# Altium PCB Alim2015.PcbDoc
Units mm, origin at the board's own origin, x right, y up, seen from the top; angles counter-clockwise.
Board outline 200 x 100 mm, 2 copper layers (Top Layer, Bottom Layer); 1 components, 34 nets, 12 pads, 0 vias.
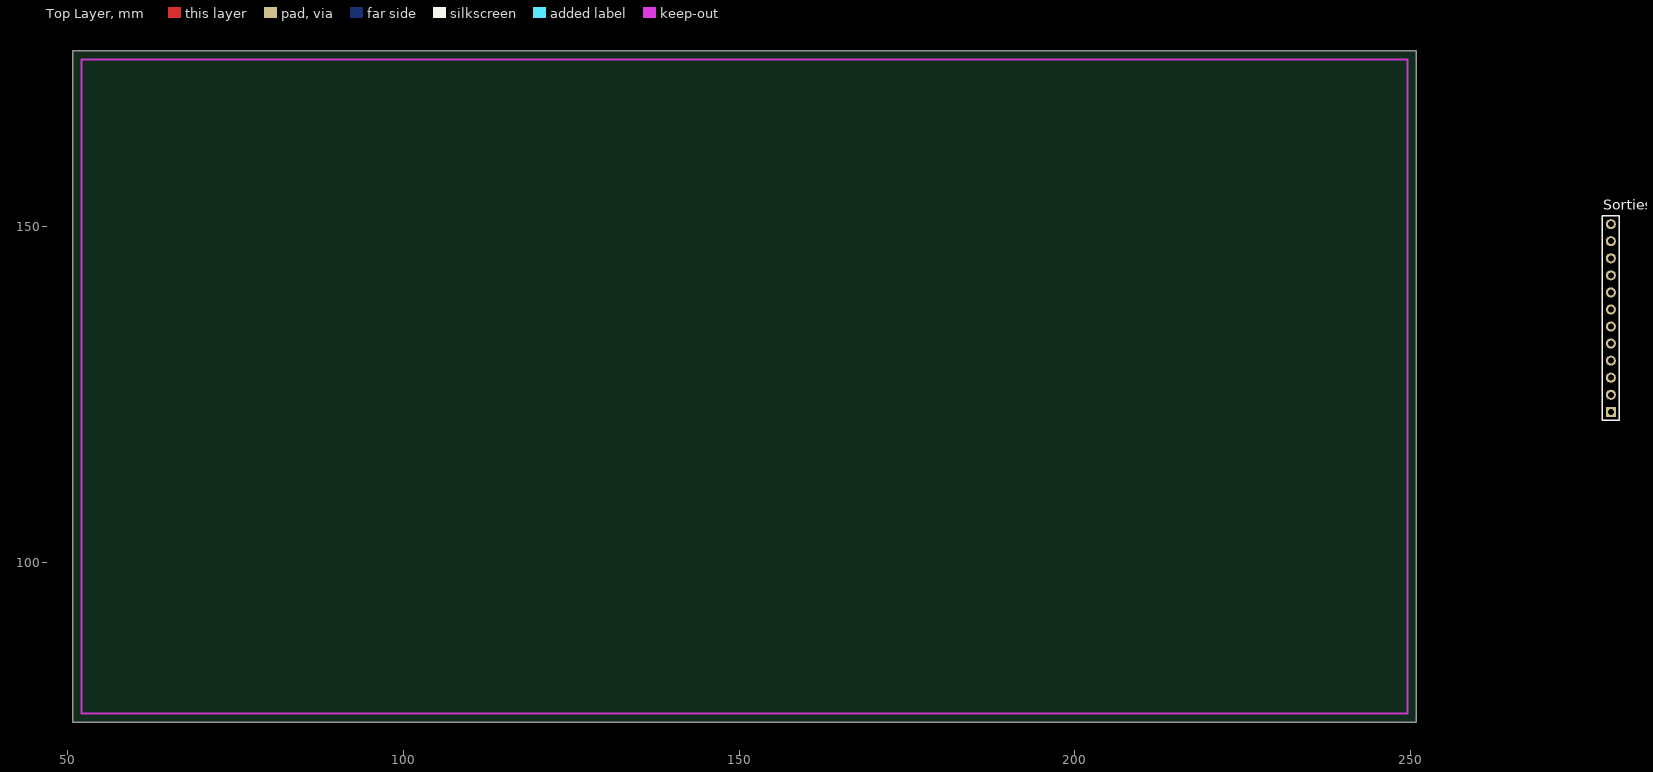
[diagram p0: Top Layer view]
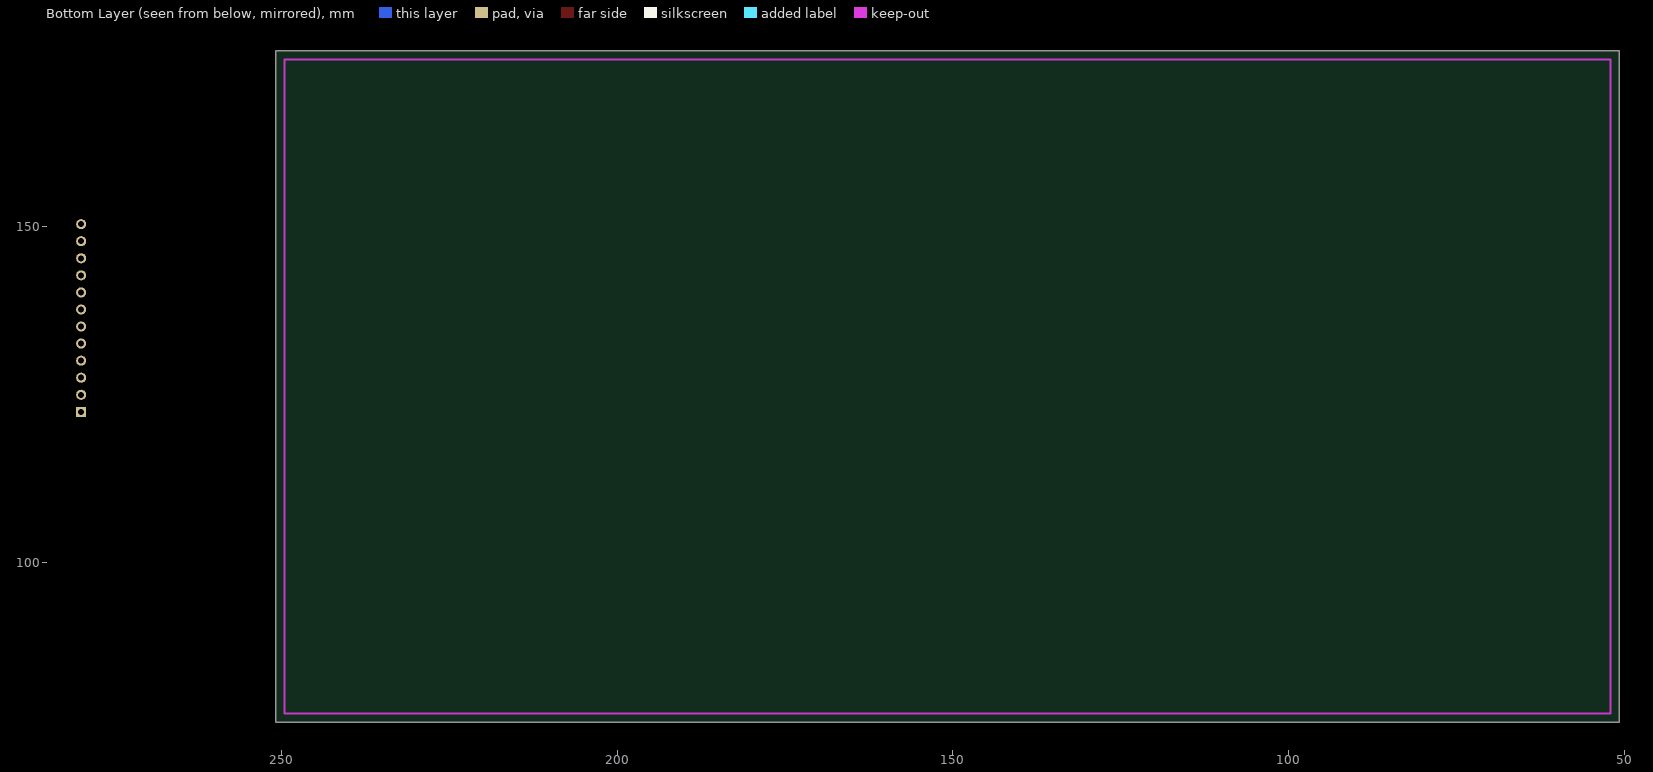
[diagram p1: Bottom Layer view, seen from below]

## Layer stack, top to bottom
Top Solder: solder mask 0.0102, Solder Resist, Dk 3.5
Top Layer: signal copper 0.0356
Dielectric 1: dielectric 0.32, FR-4, Dk 4.8
Bottom Layer: signal copper 0.0356
Bottom Solder: solder mask 0.0102, Solder Resist, Dk 3.5

## Board outline
50.8,76.2 250.8,76.2 250.8,176.2 50.8,176.2

## Design rules (kind name [scope] priority, off if disabled: settings)
Clearance [All] p1: gap=0.3
PolygonConnect [All] p1: connectstyle=Relief reliefconductorwidth=0.254 reliefentries=4 polygonreliefangle="90 Angle" airgapwidth=0.254
RoomDefinition Alim2015 [InComponentClass('Alim2015')] p1: confinementstyle=ConfineIn formatcopy=TRUE lockcomponents=FALSE outline 278.257,120.904 288.798,120.904 288.798,154.432 278.257,154.432
RoutingVias [All] p1: holewidth=0.6 width=1.5 viastyle="Through Hole" minholewidth=0.711 minwidth=1.27 maxholewidth=0.711 maxwidth=1.27
SolderMaskExpansion [All] p1: expansion=0.102
UnpouredPolygon [All] p1: allowunpoured=FALSE
Width [All] p1: maxlimit=0.5 minlimit=0.5 preferedwidth=0.5
29 further rules are at their usual default settings.

## Components (designator, comment, footprint, x,y, rotation, side; value= is the part's Value field where it differs from the comment)
Sorties "Header 12" HDR1X12 279.781,122.428 r90 top

## Footprints (in the part's own frame and the unit in brackets; to place one, negate y for a bottom-side part, rotate by r counter-clockwise, add the part's x,y. Pads: shape width x height; smd on the part's side, far side on the other; paste and mask are expansions set on the pad)
HDR1X12 [mm] "Connector; Header; 12 Position"
  rect 1.5x1.5 hole 0.9: 1(0,0)
  round 1.5 hole 0.9: 2(2.54,0) 3(5.08,0) 4(7.62,0) 5(10.16,0) 6(12.7,0) 7(15.24,0) 8(17.78,0) 9(20.32,0) 10(22.86,0) 11(25.4,0) 12(27.94,0)
  silkscreen extent -1.27,-1.27 29.21,1.27

## Part data
Sorties: "Header, 12-Pin"

## Nets (pads, with @x,y where several pads share a name; then routed paths per layer and width w, separated by ;. In a path a pad name is that pad's centre, name@x,y a point inside that pad or via, vN(x,y) a via of type N, cw(c..) or ccw(c..) an arc to the next point about the centre after c; other vN are vias at no path point)
2S: Sorties.9
4S: Sorties.1
5VACT: Sorties.7
5VELEC: Sorties.11
5VREF: 
12VACT: Sorties.5
12VMOT: Sorties.3
GND: 
"NetBascule Batteries/Alim_1": 
"NetBascule Batteries/Alim_2": 
"NetBascule Batteries/Alim_3": 
"NetBascule Batteries/Alim_4": 
"NetBascule Batteries/Alim_5": 
NetC1_2: 
NetC2_2: 
NetC3_1: 
NetC4_2: 
NetC5_2: 
NetC6_1: 
NetD3_2: 
NetD13_2: 
NetD15_2: 
NetD16_2: 
"NetLED ELEC_1": 
"NetLED ELEC_2": 
"NetLED ELEC_3": 
"NetLED ELEC_4": 
"NetLED MOT_1": 
"NetLED MOT_2": 
"NetLED MOT_3": 
"NetLED MOT_4": 
NetR2_2: 
NetR4_2: 
NetSources_7: 
pads on no net: Sorties.2 Sorties.4 Sorties.6 Sorties.8 Sorties.10 Sorties.12

## Keep-outs
Keep-Out Layer:
  lines w0.3: 52.1,77.5 52.1,174.9 249.5,174.9 249.5,77.5 52.1,77.5

## Silkscreen, mask and mechanical layers (free items; w line width, h text height)
Drill Drawing:
  text ".LEGEND" at 255.88,81.28 h1.52
  text "Drill Drawing." at 255.88,78.74 h1.52

## Dimensions
52.1,77.5 to 52.1,174.9 on Mechanical 1
52.1,77.5 to 249.5,77.5 on Mechanical 1